# Altium PCB Sensorboard Panel.pcbDoc
Units mm, origin at the board's own origin, x right, y up, seen from the top; angles counter-clockwise.
Board outline 177.2 x 219.6 mm, 2 copper layers (Top Layer, Bottom Layer), stack 1.584 mm thick; 6 components, 27 nets, 9 pads, 0 vias.
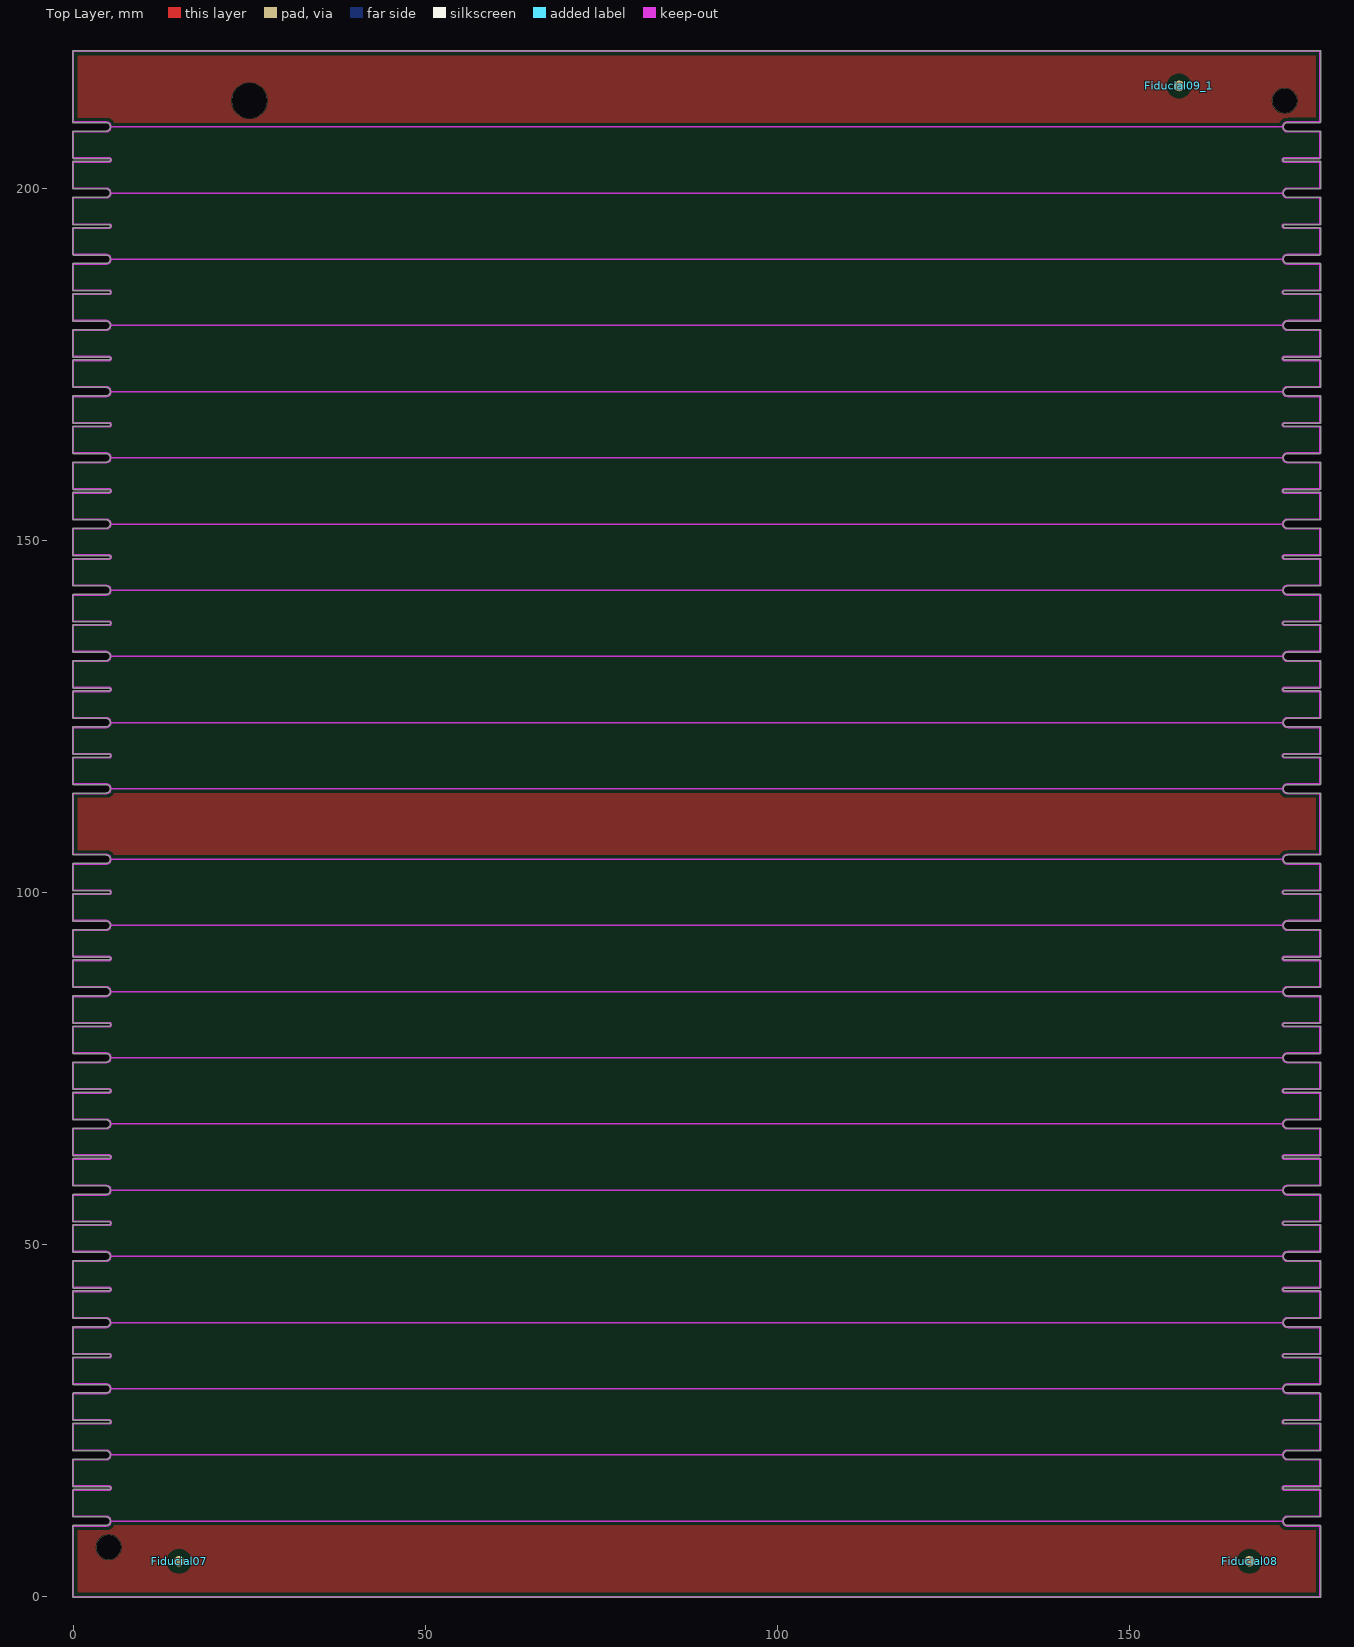
[diagram p0: Top Layer view]
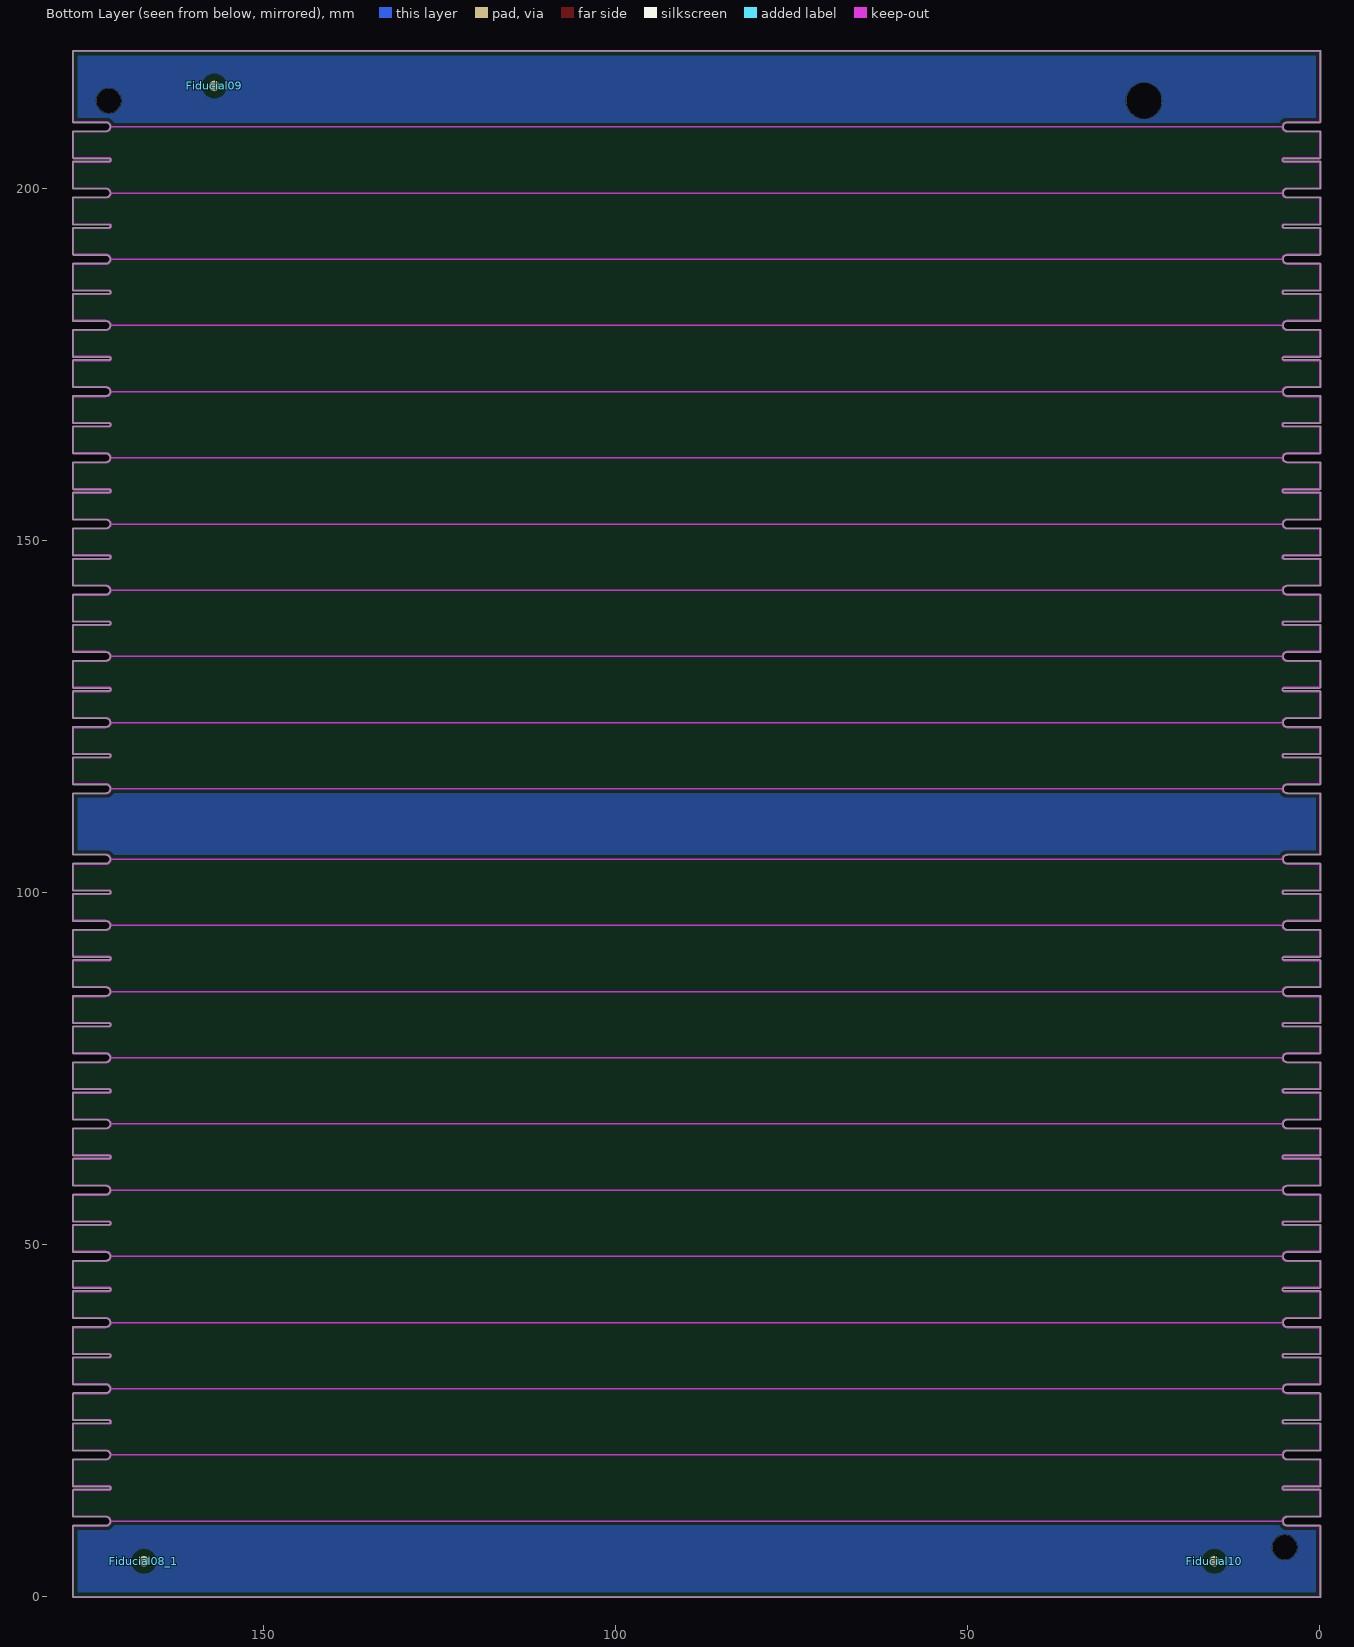
[diagram p1: Bottom Layer view, seen from below]

## Layer stack, top to bottom
Top Solder: solder mask 0.01, Solder Resist, Dk 3.5
Top Layer: signal copper 0.035
Dielectric 1: core 1.514, FR4, Dk 4.8
Bottom Layer: signal copper 0.035
Bottom Solder: solder mask 0.01, Solder Resist, Dk 3.5

## Board outline
815 vertices, not listed, extent -0.1,-0.1 177.1,219.5

## Design rules (kind name [scope] priority, off if disabled: settings)
AssemblyTestPointUsage [All] p1: valid=2
AssemblyTestpoint [All] p1: testpointundercomponent=TRUE minsize=0.8 maxsize=2.5 preferedsize=1 minholesize=0 maxholesize=1.5 preferedholesize=0.2 testpointgrid=0.025 usegrid=FALSE gridoriginx=25.375 gridoriginy=25.375 gridtolerance=0 allowsidetop=TRUE allowsidebottom=TRUE minspacing=1.275
Clearance "Clearance_Fiducial - All" [HasFootprint('Fiducial_10') or HasFootprint ('Fiducial_15')] p1: gap=1 ignorepadtopadclearanceinfootprint=FALSE
Clearance "Clearance_Component - Keepout" [All vs OnLayer('Keep-Out Layer')] p2: gap=0.5 ignorepadtopadclearanceinfootprint=FALSE
Clearance Clearance_All [All] p3: gap=0.075 ignorepadtopadclearanceinfootprint=FALSE
ComponentClearance ComponentClearance_Numbers [HasFootprint('PLANE-02') OR HasFootprint('PLANE-03') OR HasFootprint('PLANE-04') OR HasFootprint('PLANE-05') OR HasFootprint('PLANE-06') OR HasFootprint('PLANE-07') OR HasFootprint('PLANE-08') OR HasFootprint('PLANE-09') OR HasFootprint('PLANE-10') OR HasFootprint('PLANE-11') OR HasFootprint('PLANE-12') OR HasFootprint('PLANE-13') OR HasFootprint('PLANE-14') OR HasFootprint('PLANE-15') OR HasFootprint('PLANE-16') OR HasFootprint('SIGNAL-01') OR HasFootprint('SIGNAL-02') OR HasFootprint('SIGNAL-03') OR HasFootprint('SIGNAL-04') OR HasFootprint('SIGNAL-05') OR HasFootprint('SIGNAL-06') OR HasFootprint('SIGNAL-07') OR HasFootprint('SIGNAL-08') OR HasFootprint('SIGNAL-09') OR HasFootprint('SIGNAL-10') OR HasFootprint('SIGNAL-11') OR HasFootprint('SIGNAL-12') OR HasFootprint('SIGNAL-13') OR HasFootprint('SIGNAL-14') OR HasFootprint('SIGNAL-15') OR HasFootprint('SIGNAL-16') OR HasFootprint('SIGNAL-17') OR HasFootprint('SIGNAL-18') vs HasFootprint('PLANE-02') OR HasFootprint('PLANE-03') OR HasFootprint('PLANE-04') OR HasFootprint('PLANE-05') OR HasFootprint('PLANE-06') OR HasFootprint('PLANE-07') OR HasFootprint('PLANE-08') OR HasFootprint('PLANE-09') OR HasFootprint('PLANE-10') OR HasFootprint('PLANE-11') OR HasFootprint('PLANE-12') OR HasFootprint('PLANE-13') OR HasFootprint('PLANE-14') OR HasFootprint('PLANE-15') OR HasFootprint('PLANE-16') OR HasFootprint('SIGNAL-01') OR HasFootprint('SIGNAL-02') OR HasFootprint('SIGNAL-03') OR HasFootprint('SIGNAL-04') OR HasFootprint('SIGNAL-05') OR HasFootprint('SIGNAL-06') OR HasFootprint('SIGNAL-07') OR HasFootprint('SIGNAL-08') OR HasFootprint('SIGNAL-09') OR HasFootprint('SIGNAL-10') OR HasFootprint('SIGNAL-11') OR HasFootprint('SIGNAL-12') OR HasFootprint('SIGNAL-13') OR HasFootprint('SIGNAL-14') OR HasFootprint('SIGNAL-15') OR HasFootprint('SIGNAL-16') OR HasFootprint('SIGNAL-17') OR HasFootprint('SIGNAL-18')] p1: gap=0 collisioncheckmode=3 verticalgap=0 showdistances=FALSE
ComponentClearance [All] p2: gap=0.25 collisioncheckmode=3 verticalgap=0.25 showdistances=FALSE
DiffPairsRouting [All] p1: maxlimit=0.3 minlimit=0.1 mostfreqgap=0.25 toplayer_minwidth=0.1 toplayer_maxwidth=0.5 toplayer_prefwidth=0.2 bottomlayer_minwidth=0.1 bottomlayer_maxwidth=0.5 bottomlayer_prefwidth=0.2 maxuncoupledlength=12.7
HoleSize [All] p1: absolutevalues=TRUE maxlimit=5 minlimit=0.15 maxpercent=80.000 minpercent=20.000
HoleToHoleClearance [All] p1: gap=0.2 allowstackedmicrovias=FALSE
MinimumSolderMaskSliver [All] p1: minsoldermaskwidth=0.075
PasteMaskExpansion PasteMaskExpansion_All [All] p1: expansion=0
PlaneClearance [All] p1: clearance=0.2
PlaneConnect [All] p1: planeconnectstyle=Direct reliefexpansion=0.5 reliefentries=4 reliefconductorwidth=0.1 reliefairgap=0.2
PolygonConnect PolygonConnect_Via/MP [IsVia or HasFootprint('MP_10') or HasFootprint('MP_8')] p1: connectstyle=Direct reliefconductorwidth=0.254 reliefentries=4 polygonreliefangle="90 Angle" airgapwidth=0.254
PolygonConnect [All] p2: connectstyle=Relief reliefconductorwidth=0.1 reliefentries=4 polygonreliefangle="90 Angle" airgapwidth=0.2
RoutingCorners [All] p1: cornerstyle=45-Degree minsetback=2.5 maxsetback=2.5
RoutingVias RoutingMicrovia [InDrillLayerPair('Top Layer - Mid Layer 1') or InDrillLayerPair('Mid Layer 2 - Bottom Layer')] p1: holewidth=0.1 width=0.3 viastyle="Through Hole" minholewidth=0.1 minwidth=0.3 maxholewidth=0.1 maxwidth=0.3
RoutingVias [All] p2: holewidth=0.2 width=0.5 viastyle="Through Hole" minholewidth=0.15 minwidth=0.5 maxholewidth=0.25 maxwidth=0.6
SilkToSilkClearance [All] p1: silktosilkclearance=0.1
SilkToSolderMaskClearance [IsPad] p1: minsilkscreentomaskgap=0.1 clearancetoexposedcopper=TRUE
SolderMaskExpansion SolderMaskExpansion_Via [IsVia] p1: expansion=-0.075
SolderMaskExpansion SolderMaskExpansion_All [All] p2: expansion=0.05
Width [All] p1: maxlimit=1 minlimit=0.075 preferedwidth=0.15
17 further rules are at their usual default settings.

## Components (designator, comment, footprint, x,y, rotation, side; value= is the part's Value field where it differs from the comment)
Fiducial07 "01" Fiducial_15 15,5 r0 top
Fiducial08 "02" Fiducial_15 167,5 r0 top
Fiducial08_1 "02" Fiducial_15 167,5 r180 bottom
Fiducial09 "03" Fiducial_15 157,214.5 r180 bottom
Fiducial09_1 "03" Fiducial_15 157,214.5 r0 top
Fiducial10 "01" Fiducial_15 15,5 r180 bottom

## Footprints (in the part's own frame and the unit in brackets; to place one, negate y for a bottom-side part, rotate by r counter-clockwise, add the part's x,y. Pads: shape width x height; smd on the part's side, far side on the other; paste and mask are expansions set on the pad)
Fiducial_15 [mm] "Fiducial for SMD 1.5mm diameter"
  round 1.5 smd paste-1 mask+1: 0(0,0)
  body extent -0.5,-0.5 0.5,0.5, height 0

## Free pads (board coordinates)
  round 3.5 hole 3.5 unplated: 17(5,7) 17(172,212.4)
  round 5 hole 5 unplated: 17(25,212.4)

## Nets (pads, with @x,y where several pads share a name; then routed paths per layer and width w, separated by ;. In a path a pad name is that pad's centre, name@x,y a point inside that pad or via, vN(x,y) a via of type N, cw(c..) or ccw(c..) an arc to the next point about the centre after c; other vN are vias at no path point)
3.3VDC: 
Clock: 
Data_Readback: 
DataIn: 
DataOut: 
GND: 
NetC3_1: 
NetC4_1: 
NetC5_1: 
NetD5_1: 
NetD6_1: 
NetD7_1: 
NetD8_1: 
NetD9_1: 
NetD10_1: 
NetIC1_8: 
NetR8_2: 
NetR9_2: 
NetR10_2: 
NetR11_2: 
NetR12_2: 
NetR13_2: 
TX_E1: 
TX_E2: 
TX_E3: 
TX_E4: 
TX_Isend: 
pads on no net: Fiducial07.0 Fiducial08.0 Fiducial08_1.0 Fiducial09.0 Fiducial09_1.0 Fiducial10.0

## Polygon pours and split planes (outlines as drawn)
no net on Top Layer "Top" (solid, pour order 94): 0,114.7 0,104.7 177.02,104.7 177.02,114.7
no net on Top Layer "Top" (solid, pour order 88): 0,219.4 0,208.7 177.02,208.7 177.02,219.4
no net on Top Layer "Top" (solid, pour order 28): 0,10.7 0,0 177.02,0 177.02,10.7
no net on Bottom Layer "Bottom" (solid, pour order 96): 0,219.4 0,208.7 177.02,208.7 177.02,219.4
no net on Bottom Layer "Bottom" (solid, pour order 90): 0,114.7 0,104.7 177.02,104.7 177.02,114.7
no net on Bottom Layer "Bottom" (solid, pour order 92): 0,10.7 0,0 177.02,0 177.02,10.7

## Keep-outs
Keep-Out Layer:
  lines w0.2: 171.698,20.1 5.325,20.1 ; 171.698,29.5 5.325,29.5 ; 171.698,38.9 5.325,38.9 ; 171.698,48.3 5.325,48.3 ; 171.698,57.7 5.325,57.7 ; 171.698,67.1 5.325,67.1 ; 171.698,76.5 5.325,76.5 ; 171.698,85.9 5.325,85.9 ; 171.698,95.3 5.325,95.3 ; 171.698,104.7 5.325,104.7 ; 171.698,124.1 5.325,124.1 ; 171.698,133.5 5.325,133.5 ; 171.698,142.9 5.325,142.9 ; 171.698,152.3 5.325,152.3 ; 171.698,161.7 5.325,161.7 ; 171.698,171.1 5.325,171.1 ; 171.698,180.5 5.325,180.5 ; 171.698,189.9 5.325,189.9 ; 171.698,199.3 5.325,199.3 ; 171.698,208.7 5.325,208.7 ; 171.945,62.1 177,62.1 177,58.4 172.395,58.4 ccw(c172.395,57.7) 171.695,57.7 ccw(c172.395,57.7) 172.395,57 177,57 177,53.3 171.945,53.3 ccw(c171.945,53) 171.945,52.7 177,52.7 177,49 172.395,49 ccw(c172.395,48.3) 171.695,48.3 ccw(c172.395,48.3) 172.395,47.6 177,47.6 177,43.9 171.945,43.9 ccw(c171.945,43.6) 171.945,43.3 177,43.3 177,39.6 172.395,39.6 ccw(c172.395,38.9) 171.695,38.9 ccw(c172.395,38.9) 172.395,38.2 177,38.2 177,34.5 171.945,34.5 ccw(c171.945,34.2) 171.945,33.9 177,33.9 177,30.2 172.395,30.2 ccw(c172.395,29.5) 171.695,29.5 ccw(c172.395,29.5) 172.395,28.8 177,28.8 177,25.1 171.945,25.1 ccw(c171.945,24.8) 171.945,24.5 177,24.5 177,20.8 172.395,20.8 ccw(c172.395,20.1) 171.695,20.1 ccw(c172.395,20.1) 172.395,19.4 177,19.4 177,15.7 171.945,15.7 ccw(c171.945,15.4) 171.945,15.1 177,15.1 177,11.4 172.395,11.4 ccw(c172.395,10.7) 171.695,10.7 ; 171.945,62.1 cw(c171.945,62.4) 171.945,62.7 177,62.7 177,66.4 172.395,66.4 cw(c172.395,67.1) 171.695,67.1 cw(c172.395,67.1) 172.395,67.8 177,67.8 177,71.5 171.945,71.5 cw(c171.945,71.8) 171.945,72.1 177,72.1 177,75.8 172.395,75.8 cw(c172.395,76.5) 171.695,76.5 cw(c172.395,76.5) 172.395,77.2 177,77.2 177,80.9 171.945,80.9 cw(c171.945,81.2) 171.945,81.5 177,81.5 177,85.2 172.395,85.2 cw(c172.395,85.9) 171.695,85.9 cw(c172.395,85.9) 172.395,86.6 177,86.6 177,90.3 171.945,90.3 cw(c171.945,90.6) 171.945,90.9 177,90.9 177,94.6 172.395,94.6 cw(c172.395,95.3) 171.695,95.3 cw(c172.395,95.3) 172.395,96 177,96 177,99.7 171.945,99.7 cw(c171.945,100) 171.945,100.3 177,100.3 177,104 172.395,104 cw(c172.395,104.7) 171.695,104.7 cw(c172.395,104.7) 172.395,105.4 177,105.4 177,114 172.395,114 cw(c172.395,114.7) 171.695,114.7 ; 0,10 0,10 ; 0,10 0,10 ; 0,10 0,0 177,0 177,10 172.395,10 cw(c172.395,10.7) 171.695,10.7 ; 0,10 4.625,10 ccw(c4.625,10.7) 5.325,10.7 ; 0,38.2 0,38.2 ; 0,38.2 0,38.2 ; 0,38.2 4.625,38.2 ccw(c4.625,38.9) 5.325,38.9 ; 0,38.2 0,34.5 5.075,34.5 cw(c5.075,34.2) 5.075,33.9 0,33.9 0,30.2 4.625,30.2 cw(c4.625,29.5) 5.325,29.5 ; 5.325,10.7 ccw(c4.625,10.7) 4.625,11.4 0,11.4 0,15.1 5.075,15.1 ccw(c5.075,15.4) 5.075,15.7 0,15.7 0,19.4 4.625,19.4 ccw(c4.625,20.1) 5.325,20.1 ; 5.325,10.7 171.695,10.7 ; 5.325,20.1 ccw(c4.625,20.1) 4.625,20.8 0,20.8 0,24.5 5.075,24.5 ccw(c5.075,24.8) 5.075,25.1 0,25.1 0,28.8 4.625,28.8 ccw(c4.625,29.5) 5.325,29.5 ; 5.325,38.9 ccw(c4.625,38.9) 4.625,39.6 0,39.6 0,43.3 5.075,43.3 ccw(c5.075,43.6) 5.075,43.9 0,43.9 0,47.6 4.625,47.6 ccw(c4.625,48.3) 5.325,48.3 ; 5.325,48.3 ccw(c4.625,48.3) 4.625,49 0,49 0,52.7 5.075,52.7 ccw(c5.075,53) 5.075,53.3 0,53.3 0,57 4.625,57 ccw(c4.625,57.7) 5.325,57.7 ; 5.325,57.7 ccw(c4.625,57.7) 4.625,58.4 0,58.4 0,62.1 5.075,62.1 ccw(c5.075,62.4) 5.075,62.7 0,62.7 0,66.4 4.625,66.4 ccw(c4.625,67.1) 5.325,67.1 ; 5.325,67.1 ccw(c4.625,67.1) 4.625,67.8 0,67.8 0,71.5 5.075,71.5 ccw(c5.075,71.8) 5.075,72.1 0,72.1 0,75.8 4.625,75.8 ccw(c4.625,76.5) 5.325,76.5 ; 5.325,76.5 ccw(c4.625,76.5) 4.625,77.2 0,77.2 0,80.9 5.075,80.9 ccw(c5.075,81.2) 5.075,81.5 0,81.5 0,85.2 4.625,85.2 ccw(c4.625,85.9) 5.325,85.9 ; 5.325,85.9 ccw(c4.625,85.9) 4.625,86.6 0,86.6 0,90.3 5.075,90.3 ccw(c5.075,90.6) 5.075,90.9 0,90.9 0,94.6 4.625,94.6 ccw(c4.625,95.3) 5.325,95.3 ; 5.325,95.3 ccw(c4.625,95.3) 4.625,96 0,96 0,99.7 5.075,99.7 ccw(c5.075,100) 5.075,100.3 0,100.3 0,104 4.625,104 ccw(c4.625,104.7) 5.325,104.7 ; 5.325,104.7 ccw(c4.625,104.7) 4.625,105.4 0,105.4 0,114 4.625,114 ccw(c4.625,114.7) 5.325,114.7 ; 5.325,114.7 ccw(c4.625,114.7) 4.625,115.4 0,115.4 0,119.1 5.075,119.1 ccw(c5.075,119.4) 5.075,119.7 0,119.7 0,123.4 4.625,123.4 ccw(c4.625,124.1) 5.325,124.1 ; 5.325,114.7 171.695,114.7 ; 5.325,124.1 ccw(c4.625,124.1) 4.625,124.8 0,124.8 0,128.5 5.075,128.5 ccw(c5.075,128.8) 5.075,129.1 0,129.1 0,132.8 4.625,132.8 ccw(c4.625,133.5) 5.325,133.5 ; 5.325,133.5 ccw(c4.625,133.5) 4.625,134.2 0,134.2 0,137.9 5.075,137.9 ccw(c5.075,138.2) 5.075,138.5 0,138.5 0,142.2 4.625,142.2 ccw(c4.625,142.9) 5.325,142.9 ; 5.325,142.9 ccw(c4.625,142.9) 4.625,143.6 0,143.6 0,147.3 5.075,147.3 ccw(c5.075,147.6) 5.075,147.9 0,147.9 0,151.6 4.625,151.6 ccw(c4.625,152.3) 5.325,152.3 ; 5.325,152.3 ccw(c4.625,152.3) 4.625,153 0,153 0,156.7 5.075,156.7 ccw(c5.075,157) 5.075,157.3 0,157.3 0,161 4.625,161 ccw(c4.625,161.7) 5.325,161.7 ; 5.325,161.7 ccw(c4.625,161.7) 4.625,162.4 0,162.4 0,166.1 5.075,166.1 ccw(c5.075,166.4) 5.075,166.7 0,166.7 0,170.4 4.625,170.4 ccw(c4.625,171.1) 5.325,171.1 ; 5.325,171.1 ccw(c4.625,171.1) 4.625,171.8 0,171.8 0,175.5 5.075,175.5 ccw(c5.075,175.8) 5.075,176.1 0,176.1 0,179.8 4.625,179.8 ccw(c4.625,180.5) 5.325,180.5 ; 5.325,180.5 ccw(c4.625,180.5) 4.625,181.2 0,181.2 0,184.9 5.075,184.9 ccw(c5.075,185.2) 5.075,185.5 0,185.5 0,189.2 4.625,189.2 ccw(c4.625,189.9) 5.325,189.9 ; 5.325,189.9 ccw(c4.625,189.9) 4.625,190.6 0,190.6 0,194.3 5.075,194.3 ccw(c5.075,194.6) 5.075,194.9 0,194.9 0,198.6 4.625,198.6 ccw(c4.625,199.3) 5.325,199.3 ; 5.325,199.3 ccw(c4.625,199.3) 4.625,200 0,200 0,203.7 5.075,203.7 ccw(c5.075,204) 5.075,204.3 0,204.3 0,208 4.625,208 ccw(c4.625,208.7) 5.325,208.7 ; 5.325,208.7 ccw(c4.625,208.7) 4.625,209.4 0,209.4 0,219.4 177,219.4 177,209.4 172.395,209.4 ccw(c172.395,208.7) 171.695,208.7 ccw(c172.395,208.7) 172.395,208 177,208 177,204.3 171.945,204.3 ccw(c171.945,204) 171.945,203.7 177,203.7 177,200 172.395,200 ccw(c172.395,199.3) 171.695,199.3 ccw(c172.395,199.3) 172.395,198.6 177,198.6 177,194.9 171.945,194.9 ccw(c171.945,194.6) 171.945,194.3 177,194.3 177,190.6 172.395,190.6 ccw(c172.395,189.9) 171.695,189.9 ccw(c172.395,189.9) 172.395,189.2 177,189.2 177,185.5 171.945,185.5 ccw(c171.945,185.2) 171.945,184.9 177,184.9 177,181.2 172.395,181.2 ccw(c172.395,180.5) 171.695,180.5 ccw(c172.395,180.5) 172.395,179.8 177,179.8 177,176.1 171.945,176.1 ccw(c171.945,175.8) 171.945,175.5 177,175.5 177,171.8 172.395,171.8 ccw(c172.395,171.1) 171.695,171.1 ccw(c172.395,171.1) 172.395,170.4 177,170.4 177,166.7 171.945,166.7 ccw(c171.945,166.4) 171.945,166.1 177,166.1 177,162.4 172.395,162.4 ccw(c172.395,161.7) 171.695,161.7 ccw(c172.395,161.7) 172.395,161 177,161 177,157.3 171.945,157.3 ccw(c171.945,157) 171.945,156.7 177,156.7 177,153 172.395,153 ccw(c172.395,152.3) 171.695,152.3 ccw(c172.395,152.3) 172.395,151.6 177,151.6 177,147.9 171.945,147.9 ccw(c171.945,147.6) 171.945,147.3 177,147.3 177,143.6 172.395,143.6 ccw(c172.395,142.9) 171.695,142.9 ccw(c172.395,142.9) 172.395,142.2 177,142.2 177,138.5 171.945,138.5 ccw(c171.945,138.2) 171.945,137.9 177,137.9 177,134.2 172.395,134.2 ccw(c172.395,133.5) 171.695,133.5 ccw(c172.395,133.5) 172.395,132.8 177,132.8 177,129.1 171.945,129.1 ccw(c171.945,128.8) 171.945,128.5 177,128.5 177,124.8 172.395,124.8 ccw(c172.395,124.1) 171.695,124.1 ccw(c172.395,124.1) 172.395,123.4 177,123.4 177,119.7 171.945,119.7 ccw(c171.945,119.4) 171.945,119.1 177,119.1 177,115.4 172.395,115.4 ccw(c172.395,114.7) 171.695,114.7

## Silkscreen, mask and mechanical layers (free items; w line width, h text height)
Top Solder:
  text "'.a01PartNr1' '.a02PartNr2'-'.a03Version'" at 24.5,2.2 h3
Geometry PCB:
  drawing of 407 lines, arcs and shapes, not listed
V-Cut:
  lines w0.2: 5.325,10.7 171.695,10.7 ; 5.325,20.1 171.695,20.1 ; 5.325,29.5 171.695,29.5 ; 5.325,38.9 171.695,38.9 ; 5.325,48.3 171.695,48.3 ; 5.325,57.7 171.695,57.7 ; 5.325,67.1 171.695,67.1 ; 5.325,76.5 171.695,76.5 ; 5.325,85.9 171.695,85.9 ; 5.325,95.3 171.695,95.3 ; 5.325,104.7 171.695,104.7 ; 5.325,114.7 171.695,114.7 ; 5.325,124.1 171.695,124.1 ; 5.325,133.5 171.695,133.5 ; 5.325,142.9 171.695,142.9 ; 5.325,152.3 171.695,152.3 ; 5.325,161.7 171.695,161.7 ; 5.325,171.1 171.695,171.1 ; 5.325,180.5 171.695,180.5 ; 5.325,189.9 171.695,189.9 ; 5.325,199.3 171.695,199.3 ; 5.325,208.7 171.695,208.7

## Panel: embedded boards
"115959_PCB_GRS_Pro_Tx_Module_half.PcbDoc" at 0,10.7, 10 rows x 1 columns, spacing 9.4 x 49.7, rotation 0
"115959_PCB_GRS_Pro_Tx_Module_half.PcbDoc" at 0,114.7, 10 rows x 1 columns, spacing 9.4 x 49.7, rotation 0